# Altium PCB SGK_DVR_01.PcbDoc (part 2 of 7)
Units mil, origin at the board's own origin, x right, y up, seen from the top; angles counter-clockwise.
Board outline 3070.87 x 2598.47 mil, 6 copper layers (Top, L2 GND, l3 POWER, L4 SIG, L5 GND, Bottom), stack 58.1 mil thick; 475 components, 339 nets, 1964 pads, 1036 vias.
Unrouted connection lines stored in the file: 522.
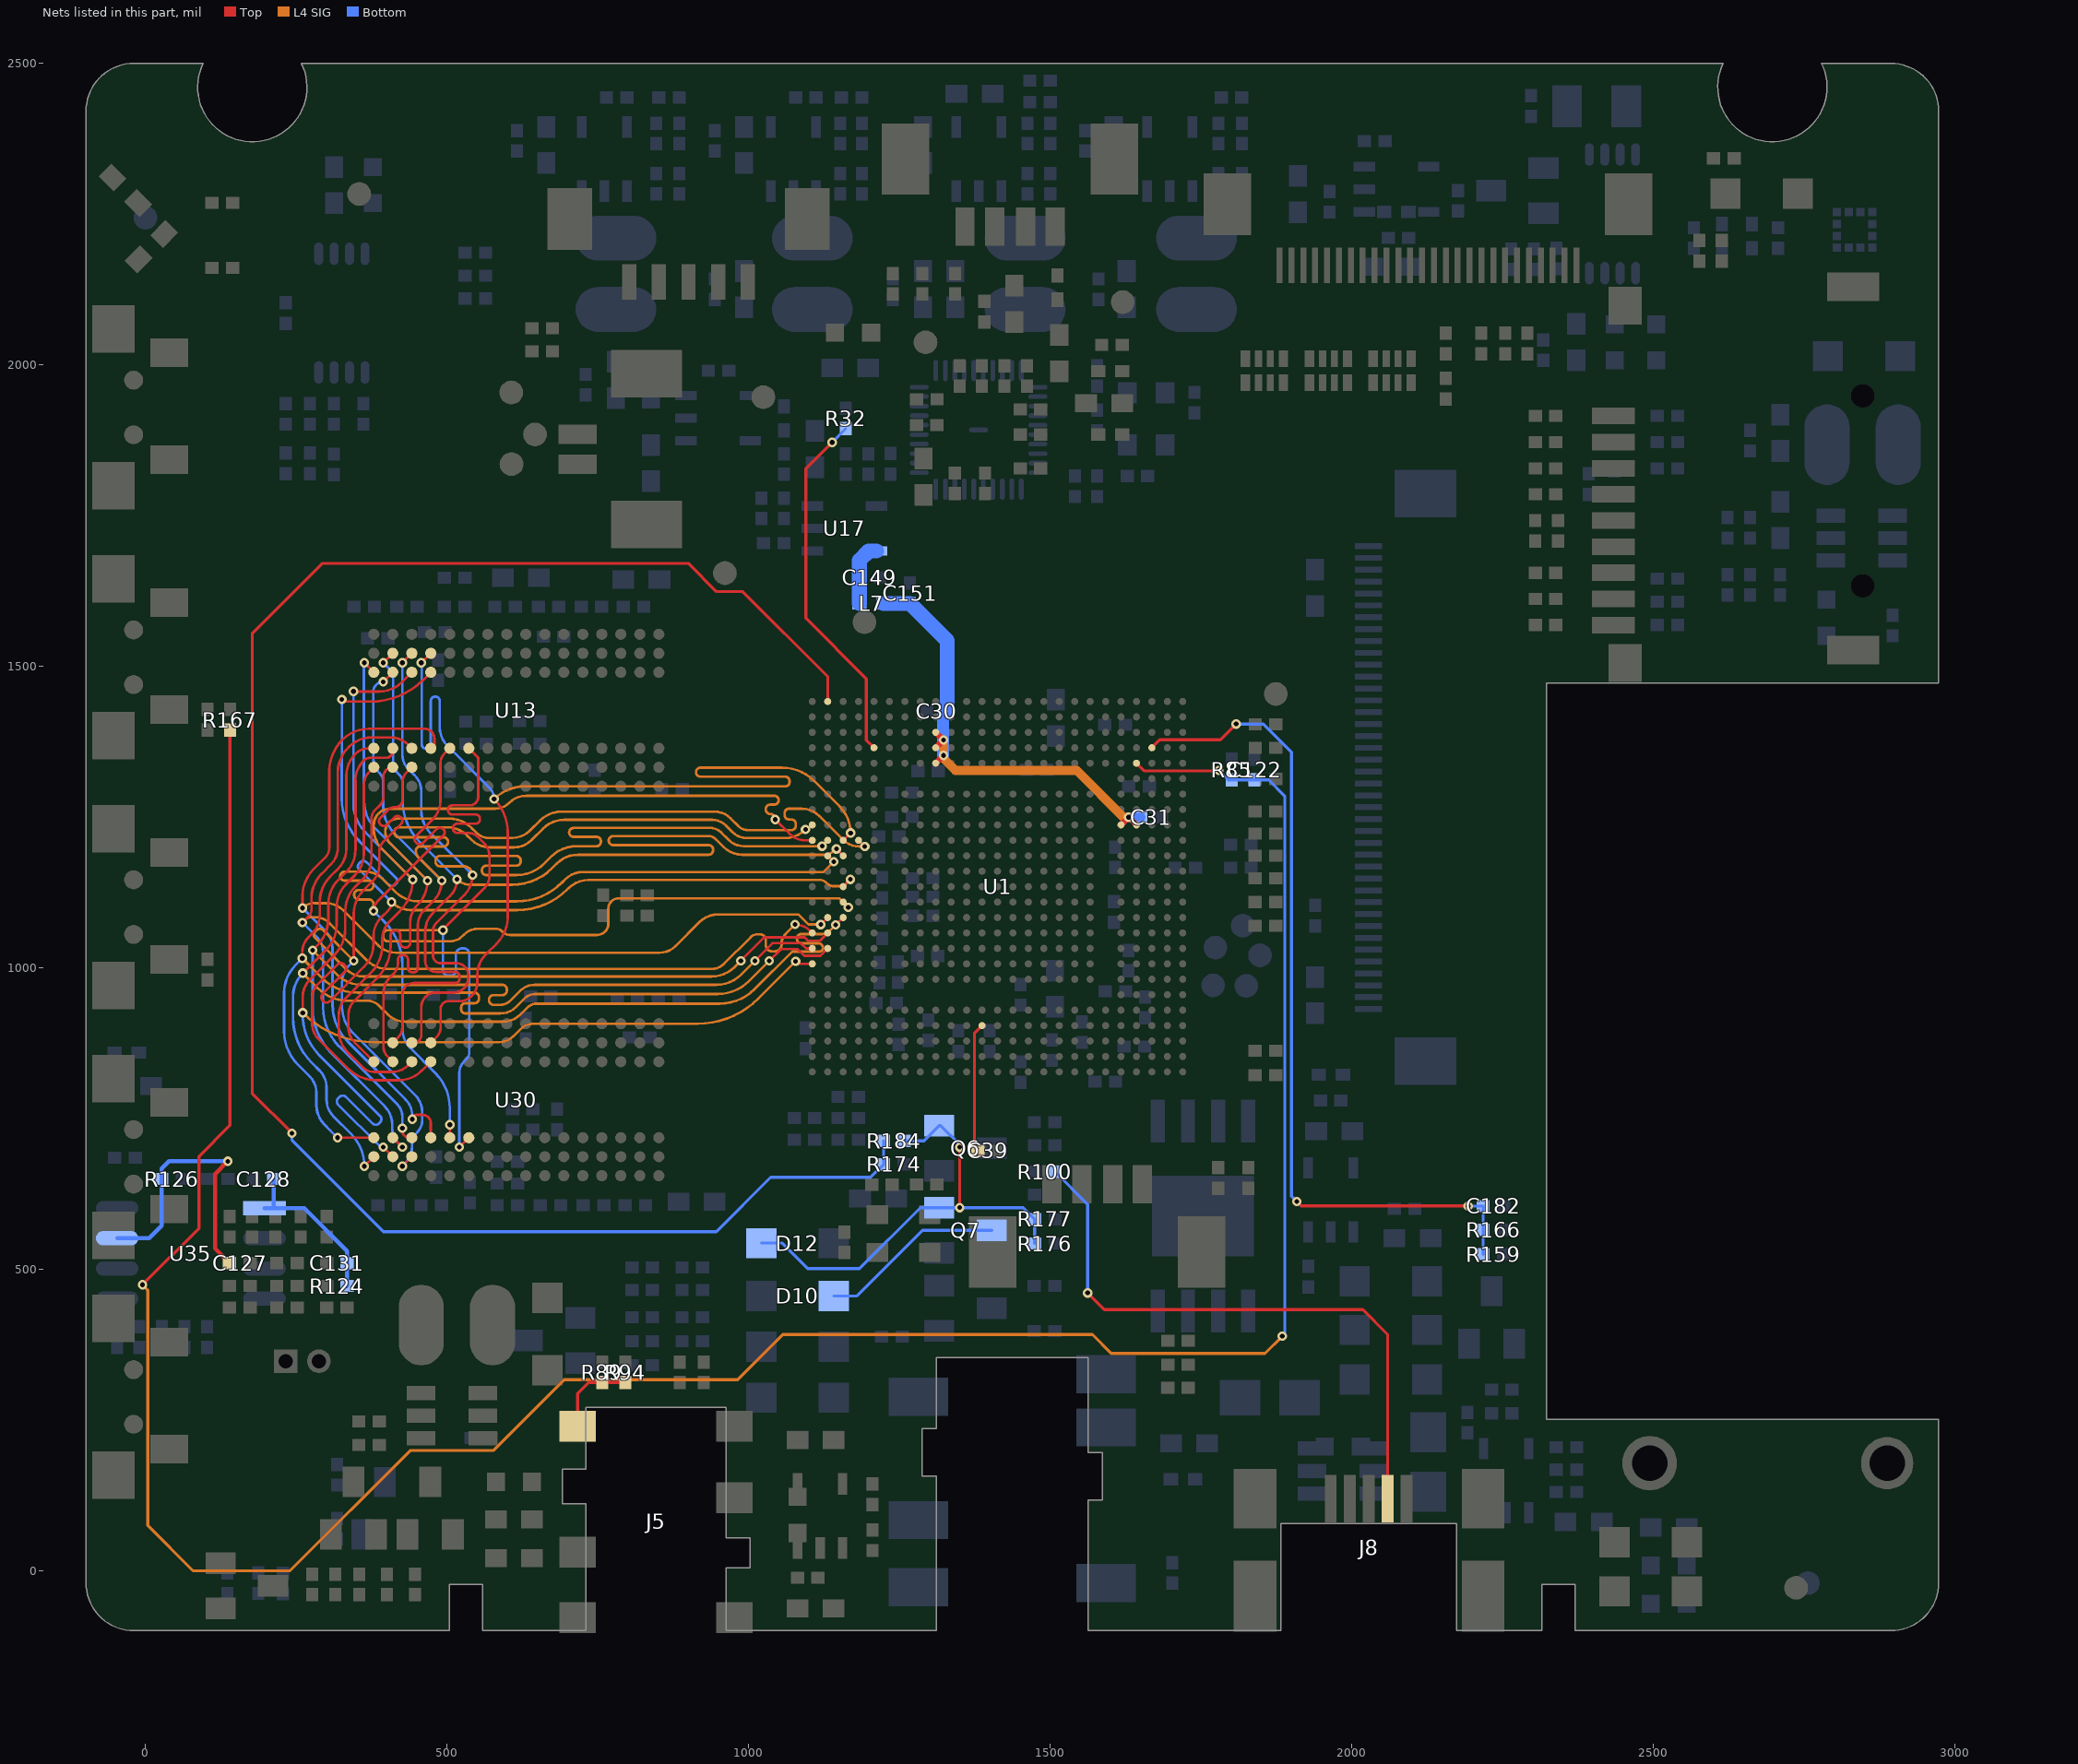
[diagram p4: the nets of this part, all layers, seen from the top]

## Part data
C1 C2 C3 C4 C5 C6 C7 C8 C9 C10 C11 C12 C13 C14 C15 C16 C17 C18 C19 C20 C21 C22 C23 C24 C25 C26 C27 C28 C29 C30 C31 C32 C33 C34 C43 C44 C56 C57 C58 C61 C62 C63 C64 C65 C68 C70 C71 C72 C73 C76 C79 C80 C81 C82 C88 C89 C90 C91 C93 C94 C95 C96 C115 C117 C124 C133 C135 C136 C138 C139 C145 C147 C149 C151 C152 C160 C176 C177 C181 C182 C183 C184 C185 C186 C201 C202 C204 C205: library part CAPACITOR
C35 C36 C49 C51 C97 C99 C101: library part CAP/CB_0
C39 C40 C41 C42 C74 C104 C105 C106 C107 C108 C109 C110 C116 C118 C119 C120 C121 C127 C128 C130 C131 C132 C137: library part CAPACITOR_0_Dup3
C45 C46 C47 C48 C50 C52 C53 C54 C66: library part "CAP NP_1"
C60: library part 1210_10nF10%-0402-X7R-50V
C67: library part 1241_100nF10%-0402-X7R-16V
C69: library part 1341_10uF20%-0603-X5R-6.3V
C77 C78 C122: library part CAPACITOR_0_Dup4
C98: library part "CAP NP_0"
C100: library part "CAP NP_1_Dup1"
C111 C112 C113 C114: library part CAPACITOR_0_Dup2
C123 C125 C126 C141 C142 C143 C144 C146 C148 C150 C153 C178 C179 C180 C196 C197 C198 C199 C200 C271 C272 C273 C274 C275 C276 C278 C282 C283 C284 C285: library part "CAP NP"
C129: library part 10uF+80%/-20%-1206-Y5V-25V
C134: library part CAPACITOR_0
C155 C156 C157 C158 C159 C161 C162 C163 C164 C165 C166 C167 C168 C169 C170 C171 C172 C173 C174 C175 C194 C195: library part CAP
CN1: library part SD/MICRO
D1: library part DIODE/SCHOTTKY
D2: library part DIODE_SCHOTTKY_0
D4 D9 D10 D11 D12 D13: library part DIODE
D5: library part DIODE_1, "二极管"
D6 D7 D8 D14: library part DIODE_0, "二极管"
FB1 FB4 FB5 FB6 FB7 FB9 FB10 FB11 FB12 FB13: library part "Ferrite BEAD"
FB8: library part INDUCTOR_0, "RoHS BEAD/600ohm 100Mhz Z=600Ω DCR<0.2Ω 800mA SMT L0603"
FPC1: library part CON40_2
J1 J2: library part CON6
J3: library part CON4
J5: library part PHONOJACK_0
J6: library part CON3_2
J7: library part CON3_0
J8: library part USB_MINI_SOCKET_2
J9: library part PHONOJACK_2
J13: library part CN30PIN_1
KEY1 KEY2 KEY3 KEY4 KEY5: library part button_1, "Button"
L1 L5 L9 L10 L11 L12: library part INDUCTOR_Dup1
L3 L7: library part INDUCTOR_2
LED1 LED2 LED3: library part LED
M1 M2 M3 M4 TP1 TP2 TP3 TP4 TP5 TP6 TP9 TP13 TP16 TP21 TP22 TP23 TP24 TP25: library part TP_0
MIC1: library part MIC_0
Q3 Q5 Q6: library part NPN
Q4 Q8: library part PMOS
Q7 Q9: library part "PNP CEB"
R1 R2 R11 R13 R45 R54 R60 R61 R62 R85 R123 R124 R125 R126 R127 R130 R132 R133 R141 R145 R146 R147 R148 R149 R150 R159 R161 R165 R166 R169 R170 R186 R187 R188: library part RESISTOR_Dup2
R3 R4 R5 R14 R15 R24 R31 R32 R33 R34 R35 R36 R49 R50 R52 R68 R69 R70 R71 R72 R73 R74 R75 R76 R77 R78 R79 R80 R104 R128 R134 R135 R136 R152 R153 R162 R164 R167 R171 R172 R192 R193 R194: library part RES/SMD_0
R6 R7 R28 R29 R30 R37 R86 R87 R88 R90 R93 R100 R105 R106 R107 R108 R109 R110 R111 R112 R113 R114 R116 R117 R118 R131 R157 R173 R174 R181 R184 R185 R198 R199 R200 R201: library part RES/SMD_1
R8 R9 R63 R64 R65 R66 R67 R82 R83 R84 R101 R102: library part ?_0
R10 R12 R46 R47 R48 R51 R53 R55 R56 R57 R58 R59 R92 R95 R96 R97 R103 R115 R178 R288: library part RESISTOR_Dup1, "RES - 200 ohm 0603 1/16W 1%"
R89 R94 R98 R99: library part RESISTOR
R121 R195 R196: library part R1005_0
R122 R129 R137 R138 R140 R142 R143 R144 R151 R154 R155 R156 R168 R177 R179 R180 R191: library part R_Dup1
R139 R163 R175 R176 R189 R190: library part R
RN4 RN5 RN6: library part 742C083/SM_0
U1: library part GK8601_12
U2: library part TCM809S
U4 U7 U17: library part RT9266PE_0
U6: library part AP3031_0
U8: library part RT8008_0
U9: library part LY8006_0
U10: library part PCF8563
U11: library part GSENSOR/BMA250E_1
U12: library part SPI-NOR-SO8_0
U13 U30: library part S25FL128P0XM_2
U14: library part RT9266PE_3
U15: library part RT9266PE_1
U16: library part RT9166
U18 U19 U20 U21: library part MP2161_2
U22: library part RT9266PE_0_Dup1
U23: library part PR2000K_0
U25: library part 2101_BL9193-3.3-SOT23-5
U35: library part LM358_0
Y1 Y3: library part CRYSTAL/4P
Y4: library part CRYSTAL_2

## Via types
v1: diameter 15.75, hole 7.87, Top to Bottom, 800 vias
v2: diameter 20, hole 12, Top to Bottom, 204 vias
v3: diameter 23.62, hole 11.81, Top to Bottom, 31 vias
v4: diameter 14, hole 8, Top to Bottom, 1 vias

## Nets (pads, with @x,y where several pads share a name; then routed paths per layer and width w, separated by ;. In a path a pad name is that pad's centre, name@x,y a point inside that pad or via, vN(x,y) a via of type N, cw(c..) or ccw(c..) an arc to the next point about the centre after c; other vN are vias at no path point)
A0: U1.AC13 U13.N3 U30.N3 | length 2342.9
  Top w4.2: v1(325.61,1445.37) 329.12,1441.86 373.56,1441.86 ccw(c373.56,1564.76) 460.46,1477.86 U13.N3@473.05,1490.44 ; v1(408.04,1109.46) cw(c388.51,1109.46) 402.32,1095.66 390.93,1084.27 ccw(c422.32,1052.88) 377.93,1052.88 377.93,1039.85 cw(c324.45,1039.85) 362.26,1002.03 305.26,945.03 cw(c300.07,950.22) 300.07,942.87 cw(c300.07,950.22) 294.87,945.03 293.49,946.4 cw(c298.69,951.6) 291.34,951.6 cw(c298.69,951.6) 293.49,956.8 330.78,994.09 ccw(c325.59,999.29) 332.94,999.29 ccw(c325.59,999.29) 330.78,1004.48 329.14,1006.13 ccw(c323.94,1000.93) 323.94,1008.28 ccw(c323.94,1000.93) 318.74,1006.13 284.71,972.1 ccw(c304.28,952.53) 276.6,952.53 276.6,906.43 ccw(c309.67,906.43) 286.29,883.05 336.24,833.1 ccw(c382.18,879.04) 382.18,814.07 419.35,814.07 ccw(c419.35,869.58) 458.6,830.33 U30.N3@473.05,844.78 ; U1.AC13@1156.52,1135.01 v1(1168.58,1147.18)
  L4 SIG w4.2: v1(1168.58,1147.18) 1161.19,1139.78 ; 439.82,1096.3 cw(c439.82,1141.24) v1(408.04,1109.46) ccw(c439.82,1141.24) 439.82,1096.3 ; 439.82,1096.3 616.64,1096.3 ; 616.64,1096.3 ccw(c616.64,1213.28) 699.36,1130.56 ; 616.64,1096.3 ccw(c616.64,1213.28) 699.36,1130.56 ; 699.36,1130.56 701.19,1132.4 ; 701.19,1132.4 cw(c734.48,1099.11) 734.48,1146.18 ; 701.19,1132.4 cw(c734.48,1099.11) 734.48,1146.18 ; 734.48,1146.18 1117.57,1146.18 ; 1117.57,1146.18 cw(c1117.57,1130.67) 1128.54,1141.64 ; 1117.57,1146.18 cw(c1117.57,1130.67) 1128.54,1141.64 ; 1128.54,1141.64 1129.67,1140.51 ; 1129.67,1140.51 ccw(c1141.27,1152.1) 1141.27,1135.71 ; 1129.67,1140.51 ccw(c1141.27,1152.1) 1141.27,1135.71 ; 1141.27,1135.71 1151.34,1135.71 ; 1151.34,1135.71 ccw(c1151.34,1149.63) 1161.18,1139.78 ; 1151.34,1135.71 ccw(c1151.34,1149.63) 1161.18,1139.78
  Bottom w4.2: v1(325.61,1445.37) 325.61,1397.94 325.38,1281.13 ccw(c425.41,1281.13) 354.68,1210.4 415.17,1149.9 cw(c409.98,1144.71) 417.33,1144.71 cw(c409.98,1144.71) 415.18,1139.52 413.94,1138.27 cw(c408.74,1143.47) 408.74,1136.12 cw(c408.74,1143.47) 403.55,1138.26 ; 356.1,1175.32 354.33,1173.56 ccw(c359.53,1168.36) 352.18,1168.36 ccw(c359.53,1168.36) 354.33,1163.17 v1(408.04,1109.46) ; 356.1,1175.32 cw(c361.29,1170.12) 361.29,1177.47 cw(c361.29,1170.12) 366.49,1175.32 403.54,1138.27
A1: U1.AE16 U13.P7 U30.P7 | length 2016.9
  Top w4.2: v1(260.15,1075.38) 269.91,1085.14 ccw(c256.84,1098.22) 275.33,1098.22 275.33,1115.94 cw(c333,1115.94) 292.22,1156.72 307.75,1172.25 ccw(c281.08,1198.92) 318.8,1198.92 318.8,1323.34 cw(c379.56,1323.34) 336.59,1366.3 cw(c375.79,1327.1) 375.79,1382.54 406.38,1382.54 cw(c406.38,1341.25) 435.57,1370.44 U13.P7@441.55,1364.46 ; v1(425.81,734.54) 425.81,730.37 ccw(c437.39,730.37) 437.39,718.79 U30.P7@441.55,718.79 ; U1.AE16@1105.34,1058.24 U1.AE16@1101.42,1062.16 ; U1.AE16@1101.42,1062.16 ccw(c1076.9,1037.64) v1(1076.9,1072.31) cw(c1076.9,1037.64) U1.AE16@1101.42,1062.16
  L4 SIG w4.2: v1(260.15,1075.38) v1@264.24,1079.48 ; v1(1076.9,1072.31) 1060.96,1056.37 ; v1@264.24,1079.48 cw(c276.04,1067.68) 276.04,1084.36 ; v1@264.24,1079.48 cw(c276.04,1067.68) 276.04,1084.36 ; 276.04,1084.36 282.09,1084.36 ; 282.09,1084.36 cw(c282.09,1051.97) 304.99,1074.88 ; 282.09,1084.36 cw(c282.09,1051.97) 304.99,1074.88 ; 304.99,1074.88 366.68,1013.19 ; 366.68,1013.19 ccw(c401.83,1048.34) 401.83,998.63 ; 366.68,1013.19 ccw(c401.83,1048.34) 401.83,998.63 ; 401.83,998.63 939.21,998.63 ; 939.21,998.63 ccw(c939.21,1026) 958.56,1006.65 ; 939.21,998.63 ccw(c939.21,1026) 958.56,1006.65 ; 958.56,1006.65 1003.16,1051.24 ; 1003.16,1051.24 cw(c1015.01,1039.39) 1015.01,1056.15 ; 1003.16,1051.24 cw(c1015.01,1039.39) 1015.01,1056.15 ; 1015.01,1056.15 1018.24,1056.15 ; 1018.24,1056.15 cw(c1018.24,1045.98) 1028.42,1045.98 ; 1018.24,1056.15 cw(c1018.24,1045.98) 1028.42,1045.98 ; 1028.42,1037.58 ccw(c1038.23,1037.58) 1038.23,1027.77 ; 1028.42,1037.58 ccw(c1038.23,1037.58) 1038.23,1027.77 ; 1028.42,1037.58 1028.42,1045.98 ; 1038.23,1027.77 1043.55,1027.77 ; 1043.55,1027.77 ccw(c1043.55,1038.72) 1054.5,1038.72 ; 1043.55,1027.77 ccw(c1043.55,1038.72) 1054.5,1038.72 ; 1054.5,1038.72 1054.5,1040.77 ; 1054.5,1040.77 cw(c1076.56,1040.77) 1060.96,1056.37 ; 1054.5,1040.77 cw(c1076.56,1040.77) 1060.96,1056.37
  Bottom w4.2: v1(260.15,1075.38) 284.69,1050.84 cw(c261.26,1027.41) 294.4,1027.41 294.4,934.97 ccw(c386.02,934.97) 321.23,870.18 417.42,774 cw(c397.16,753.75) 425.81,753.75 v1(425.81,734.54)
A2: U1.AE10 U13.P3 U30.P3 | length 2349.8
  Top w4.2: v1(344.8,1458.73) 345.07,1458.47 386.94,1458.47 ccw(c386.94,1513.1) 425.58,1474.47 U13.P3@441.55,1490.44 ; U30.P3@441.55,844.78 435.52,838.74 cw(c408.76,865.51) 408.76,827.66 378.92,827.66 cw(c378.92,853.93) 360.34,835.35 335.41,860.28 cw(c371.94,896.81) 320.28,896.81 320.28,920.3 cw(c364.87,920.3) 333.34,951.83 373.47,991.96 ccw(c326.98,1038.45) 392.73,1038.45 392.73,1048.65 cw(c432.82,1048.65) 404.47,1076.99 420.93,1093.46 ccw(c367.68,1146.71) 442.94,1143.85 442.99,1143.91 v1(442.99,1146.77) ; v1(1043.87,1246.35) 1067.33,1222.89 ; U1.AE10@1105.34,1211.78 1094.14,1211.78 ; 1067.33,1222.89 ccw(c1094.14,1249.7) 1094.14,1211.78 ; 1067.33,1222.89 ccw(c1094.14,1249.7) 1094.14,1211.78
  L4 SIG w4.2: v1(442.99,1146.77) 392,1197.76 ; v1(1043.87,1246.35) v1@1043.87,1247.29 ; 378.36,1230.68 ccw(c424.91,1230.68) 392,1197.76 ; 378.36,1230.68 ccw(c424.91,1230.68) 392,1197.76 ; 378.36,1230.68 ccw(c424.91,1230.68) 392,1197.76 ; 378.36,1230.68 ccw(c424.91,1230.68) 392,1197.76 ; 378.36,1230.68 ccw(c424.91,1230.68) 392,1197.76 ; 378.36,1230.68 ccw(c424.91,1230.68) 392,1197.76 ; 378.36,1230.68 378.36,1237.05 ; 378.36,1237.05 cw(c405.59,1237.05) 405.59,1264.28 ; 378.36,1237.05 cw(c405.59,1237.05) 405.59,1264.28 ; 405.59,1264.28 579.78,1264.28 ; 579.78,1264.28 ccw(c579.78,1297.02) 602.93,1273.87 ; 579.78,1264.28 ccw(c579.78,1297.02) 602.93,1273.87 ; 602.93,1273.87 603.34,1274.28 ; 603.34,1274.28 cw(c631.13,1246.5) 631.13,1285.79 ; 603.34,1274.28 cw(c631.13,1246.5) 631.13,1285.79 ; 603.34,1274.28 cw(c631.13,1246.5) 631.13,1285.79 ; 603.34,1274.28 cw(c631.13,1246.5) 631.13,1285.79 ; 603.34,1274.28 cw(c631.13,1246.5) 631.13,1285.79 ; 603.34,1274.28 cw(c631.13,1246.5) 631.13,1285.79 ; 631.13,1285.79 1042.32,1285.79 ; 1028.28,1262.89 ccw(c1035.63,1262.89) 1035.63,1255.54 ; 1028.28,1262.89 ccw(c1035.63,1262.89) 1035.63,1255.54 ; 1028.28,1262.89 1028.28,1263.68 ; 1028.28,1263.68 cw(c1035.63,1263.68) 1035.63,1271.03 ; 1028.28,1263.68 cw(c1035.63,1263.68) 1035.63,1271.03 ; 1035.63,1255.54 cw(c1035.63,1247.29) v1@1043.87,1247.29 ; 1035.63,1255.54 cw(c1035.63,1247.29) v1@1043.87,1247.29 ; 1035.63,1271.03 1042.32,1271.03 ; 1042.32,1271.03 ccw(c1042.32,1278.38) 1049.67,1278.38 ; 1042.32,1271.03 ccw(c1042.32,1278.38) 1049.67,1278.38 ; 1042.32,1285.79 cw(c1042.32,1278.44) 1049.67,1278.44 ; 1042.32,1285.79 cw(c1042.32,1278.44) 1049.67,1278.44 ; 1049.67,1278.38 1049.67,1278.44
  Bottom w4.2: v1(344.8,1458.73) 344.8,1272.41 ccw(c411.06,1272.41) 364.21,1225.55 v1(442.99,1146.77)
A3: U1.AC10 U13.N2 U30.N2 | length 2351.5
  Top w4.2: v1(457.3,1506.19) U13.N2@473.05,1521.94 ; U30.N2@473.05,876.27 482.81,886.03 ccw(c467.4,901.43) 489.19,901.43 489.19,931.88 cw(c502.6,931.88) 502.6,945.29 521.86,945.29 ccw(c521.86,970.41) 539.61,952.64 541.44,954.47 ccw(c520.82,975.1) 549.98,975.1 549.98,987.49 cw(c600.74,987.49) 564.85,1023.38 582.06,1040.59 ccw(c537.28,1085.37) 600.61,1085.37 600.61,1225.29 ccw(c522.51,1225.29) 579.06,1279.17 v1(578.1,1280.24) ; v1@578.02,1280.21 v1(578.1,1280.24) ; U1.AC10@1156.52,1211.78 v1(1168.94,1224.03)
  L4 SIG w4.2: 628.91,1301.29 ccw(c628.91,1229.43) v1(578.1,1280.24) cw(c628.91,1229.43) 628.91,1301.29 ; 628.91,1301.29 646.28,1301.28 1060.42,1301.28 ; 912.65,1324.74 ccw(c920,1324.74) 920,1317.39 ; 912.65,1324.74 ccw(c920,1324.74) 920,1317.39 ; 912.65,1324.74 912.65,1324.99 ; 912.65,1324.99 cw(c920,1324.99) 920,1332.34 ; 912.65,1324.99 cw(c920,1324.99) 920,1332.34 ; 920,1317.39 1060.42,1317.39 ; 920,1332.34 1055.08,1332.34 ; 1055.08,1332.34 cw(c1055.08,1256.51) 1108.7,1310.13 ; 1055.08,1332.34 cw(c1055.08,1256.51) 1108.7,1310.13 ; 1060.42,1301.28 ccw(c1060.42,1308.63) 1067.77,1308.63 ; 1060.42,1301.28 ccw(c1060.42,1308.63) 1067.77,1308.63 ; 1060.42,1317.39 cw(c1060.42,1310.04) 1067.77,1310.04 ; 1060.42,1317.39 cw(c1060.42,1310.04) 1067.77,1310.04 ; 1067.77,1308.63 1067.77,1310.04 ; 1108.7,1310.13 1150.66,1268.17 ; 1150.66,1268.17 cw(c1106.52,1224.03) v1(1168.94,1224.03) ; 1150.66,1268.17 cw(c1106.52,1224.03) v1(1168.94,1224.03) ; 1150.66,1268.17 cw(c1106.52,1224.03) v1(1168.94,1224.03) ; 1150.66,1268.17 cw(c1106.52,1224.03) v1(1168.94,1224.03) ; 1150.66,1268.17 cw(c1106.52,1224.03) v1(1168.94,1224.03) ; 1150.66,1268.17 cw(c1106.52,1224.03) v1(1168.94,1224.03)
  Bottom w4.2: v1(457.3,1506.19) 458.11,1505.39 458.11,1370.95 ccw(c465.46,1370.95) 465.46,1363.6 465.66,1363.6 ccw(c465.66,1370.95) 473.01,1370.95 473.01,1442.8 cw(c480.36,1442.8) 480.36,1450.15 480.5,1450.15 cw(c480.5,1442.8) 487.85,1442.8 487.85,1399.14 ccw(c530.65,1399.14) 500.38,1368.88 570.23,1299.03 cw(c551.44,1280.24) 577.63,1284.74 577.63,1280.62 v1(578.1,1280.24)
A4: U1.AD16 U13.P8 U30.P8 | length 2105.1
  Top w4.2: v1(345.37,1012.08) 345.37,1030.86 345.33,1030.9 345.33,1089.41 cw(c402.11,1089.41) 361.98,1129.58 377.22,1144.81 ccw(c351.79,1170.27) 387.77,1170.27 387.77,1193.16 cw(c411.2,1193.16) 394.63,1209.72 423.81,1238.9 ccw(c418.61,1244.1) 425.96,1244.1 ccw(c418.61,1244.1) 423.81,1249.29 423.14,1249.96 ccw(c417.94,1244.77) 417.94,1252.12 ccw(c417.94,1244.77) 412.75,1249.96 ; 412.75,1249.96 400.47,1237.69 cw(c395.27,1242.89) 395.27,1235.54 cw(c395.27,1242.89) 390.08,1237.69 389.21,1238.56 cw(c394.41,1243.75) 387.06,1243.75 cw(c394.41,1243.75) 389.21,1248.95 403,1262.74 cw(c412.92,1252.81) 412.92,1266.85 414.84,1266.85 ccw(c414.84,1278.03) 426.02,1278.03 426.02,1308.42 cw(c447.77,1308.42) 432.39,1323.8 U13.P8@441.55,1332.96 ; v1(425.81,671.55) U30.P8@441.55,687.29 ; v1(986.92,1012.02) 1025.82,1050.92 1092.8,1050.92 1098.4,1045.32 1118.01,1045.32 U1.AD16@1130.93,1058.24
  L4 SIG w4.2: v1(345.37,1012.08) 294.34,1063.11 ; v1(986.92,1012.02) 976.56,1001.71 ; 279.09,1055.21 cw(c286.44,1055.21) 281.25,1060.41 ; 279.09,1055.21 cw(c286.44,1055.21) 281.25,1060.41 ; 279.09,1055.21 ccw(c286.44,1055.21) 281.25,1050.01 ; 279.09,1055.21 ccw(c286.44,1055.21) 281.25,1050.01 ; 281.25,1050.01 334.08,997.18 ; 281.25,1060.41 283.95,1063.11 ; 283.95,1063.11 cw(c289.14,1057.91) 289.14,1065.26 ; 283.95,1063.11 cw(c289.14,1057.91) 289.14,1065.26 ; 289.14,1065.26 cw(c289.14,1057.91) 294.34,1063.11 ; 289.14,1065.26 cw(c289.14,1057.91) 294.34,1063.11 ; 289.14,1065.26 cw(c289.14,1057.91) 294.34,1063.11 ; 289.14,1065.26 cw(c289.14,1057.91) 294.34,1063.11 ; 289.14,1065.26 cw(c289.14,1057.91) 294.34,1063.11 ; 289.14,1065.26 cw(c289.14,1057.91) 294.34,1063.11 ; 334.08,997.18 ccw(c361.25,1024.36) 361.25,985.93 ; 334.08,997.18 ccw(c361.25,1024.36) 361.25,985.93 ; 334.08,997.18 ccw(c361.25,1024.36) 361.25,985.93 ; 334.08,997.18 ccw(c361.25,1024.36) 361.25,985.93 ; 334.08,997.18 ccw(c361.25,1024.36) 361.25,985.93 ; 334.08,997.18 ccw(c361.25,1024.36) 361.25,985.93 ; 361.25,985.93 938.47,985.93 ; 938.47,985.93 ccw(c938.47,1039.8) 976.56,1001.71 ; 938.47,985.93 ccw(c938.47,1039.8) 976.56,1001.71
  Bottom w4.2: v1(345.37,1012.08) 337.63,1004.34 ccw(c366.13,975.84) 325.82,975.84 325.82,936.74 ccw(c388.8,936.74) 344.27,892.21 446.94,789.53 cw(c418.05,760.65) 458.91,760.65 458.91,747.84 cw(c430.68,747.84) 450.64,727.88 ccw(c471.17,707.34) 442.13,707.34 442.13,704.95 cw(c400.91,704.95) 430.06,675.8 v1(425.81,671.55)
A5: U1.AD10 U13.P2 U30.P2 | length 2447.8
  Top w4.2: v1(425.81,1506.19) U13.P2@441.55,1521.94 ; U30.P2@441.55,876.27 444.71,876.27 ccw(c444.71,888.8) 457.24,888.8 457.24,935.5 cw(c481.2,935.5) 481.2,959.47 510.89,959.47 ccw(c510.89,983.79) 535.22,983.79 535.22,988.31 ccw(c515.5,988.31) 515.5,1008.03 489.61,1008.03 cw(c489.61,1020.98) 476.65,1020.98 476.65,1061.51 cw(c495.26,1061.51) 482.1,1074.67 528.57,1121.13 ccw(c495.56,1154.14) v1(542.24,1154.14) ; v1(1121.7,1202.16) U1.AD10@1130.93,1211.78
  L4 SIG w4.2: v1(1121.7,1202.16) 992.04,1202.16 ; 480.86,1176.22 ccw(c488.21,1176.22) 488.21,1168.87 ; 480.86,1176.22 ccw(c488.21,1176.22) 488.21,1168.87 ; 480.86,1176.22 480.86,1178.54 ; 480.86,1178.54 cw(c488.21,1178.54) 488.21,1185.89 ; 480.86,1178.54 cw(c488.21,1178.54) 488.21,1185.89 ; 488.21,1168.87 527.51,1168.87 ; 488.21,1185.89 614.69,1185.89 ; 527.51,1168.87 cw(c527.51,1154.14) v1(542.24,1154.14) ccw(c527.51,1154.14) 527.51,1168.87 ; 557.69,1161.49 ccw(c565.03,1161.49) 565.03,1154.14 ; 557.69,1161.49 ccw(c565.03,1161.49) 565.03,1154.14 ; 557.68,1161.49 557.68,1162.41 ; 557.69,1162.41 cw(c565.03,1162.41) 565.03,1169.76 ; 557.69,1162.41 cw(c565.03,1162.41) 565.03,1169.76 ; 565.03,1154.14 614.91,1154.14 ; 565.03,1169.76 614.69,1169.76 ; 614.69,1169.76 ccw(c614.69,1177.11) 622.04,1177.11 ; 614.69,1169.76 ccw(c614.69,1177.11) 622.04,1177.11 ; 614.69,1185.89 cw(c614.69,1178.54) 622.04,1178.54 ; 614.69,1185.89 cw(c614.69,1178.54) 622.04,1178.54 ; 614.91,1154.14 ccw(c614.91,1219.37) 661.03,1173.24 ; 614.91,1154.14 ccw(c614.91,1219.37) 661.03,1173.24 ; 622.04,1177.11 622.04,1178.54 ; 661.03,1173.24 672.47,1184.68 ; 672.47,1184.68 cw(c714.67,1142.48) 714.67,1202.16 ; 672.47,1184.68 cw(c714.67,1142.48) 714.67,1202.16 ; 672.47,1184.68 cw(c714.67,1142.48) 714.67,1202.16 ; 672.47,1184.68 cw(c714.67,1142.48) 714.67,1202.16 ; 672.47,1184.68 cw(c714.67,1142.48) 714.67,1202.16 ; 672.47,1184.68 cw(c714.67,1142.48) 714.67,1202.16 ; 702.4,1224.95 ccw(c709.75,1224.95) 709.75,1217.6 ; 702.4,1224.95 ccw(c709.75,1224.95) 709.75,1217.6 ; 702.4,1224.95 702.4,1225.06 ; 702.4,1225.06 cw(c709.75,1225.06) 709.75,1232.41 ; 702.4,1225.06 cw(c709.75,1225.06) 709.75,1232.41 ; 709.75,1217.6 747.69,1217.6 ; 709.75,1232.41 936.06,1232.41 ; 714.67,1202.16 747.69,1202.16 ; 747.69,1202.16 ccw(c747.69,1209.51) 755.04,1209.51 ; 747.69,1202.16 ccw(c747.69,1209.51) 755.04,1209.51 ; 747.69,1217.6 cw(c747.69,1210.25) 755.04,1210.25 ; 747.69,1217.6 cw(c747.69,1210.25) 755.04,1210.25 ; 755.04,1209.51 755.04,1210.25 ; 936.06,1232.41 cw(c936.06,1206.45) 954.42,1224.81 ; 936.06,1232.41 cw(c936.06,1206.45) 954.42,1224.81 ; 954.42,1224.81 966.48,1212.74 ; 966.48,1212.74 ccw(c992.04,1238.31) 992.04,1202.16 ; 966.48,1212.74 ccw(c992.04,1238.31) 992.04,1202.16 ; 966.48,1212.74 ccw(c992.04,1238.31) 992.04,1202.16 ; 966.48,1212.74 ccw(c992.04,1238.31) 992.04,1202.16 ; 966.48,1212.74 ccw(c992.04,1238.31) 992.04,1202.16 ; 966.48,1212.74 ccw(c992.04,1238.31) 992.04,1202.16
  Bottom w4.2: v1(425.81,1506.19) 425.81,1354.11 ccw(c459.65,1354.11) 435.72,1330.18 446.15,1319.75 cw(c419.41,1293) 457.23,1293 457.23,1261.51 ccw(c511.23,1261.51) 473.05,1223.33 v1(542.24,1154.14)
A6: U1.AE18 U13.R8 U30.R8 | length 2567.8
  Top w4.2: v1(260.75,925.84) 260.75,952.36 cw(c301.25,952.36) 272.62,980.99 312.75,1021.13 ccw(c268.2,1065.67) 331.2,1065.67 331.2,1094.8 cw(c388.33,1094.8) 347.93,1135.19 360.93,1148.19 ccw(c327.97,1181.14) 374.57,1181.14 374.57,1246.66 cw(c397.3,1246.66) 381.23,1262.73 388.41,1269.91 ccw(c373.75,1284.56) 394.45,1283.45 ccw(c373.73,1284.56) 394.48,1284.56 394.48,1317.39 cw(c410.06,1317.39) U13.R8@410.06,1332.96 ; v1(394.31,703.04) U30.R8@410.06,687.29 ; v1(1077.8,1011.31) 1080.5,1007.06 U1.AE18@1105.34,1007.06
  L4 SIG w4.2: v1(1077.8,1011.31) 1015.95,949.46 ; 378.04,877.26 cw(c378.04,1043.13) v1(260.75,925.84) ccw(c378.04,1043.13) 378.04,877.26 ; 378.04,877.26 586.6,877.26 ; 586.6,877.26 ccw(c586.6,910.21) 609.9,886.91 ; 586.6,877.26 ccw(c586.6,910.21) 609.9,886.91 ; 609.9,886.91 621.79,898.8 ; 621.79,898.8 cw(c643.5,877.09) 643.5,907.79 ; 621.79,898.8 cw(c643.5,877.09) 643.5,907.79 ; 643.5,907.79 915.36,907.79 ; 915.36,907.79 ccw(c915.36,1050.04) 1015.95,949.46 ; 915.36,907.79 ccw(c915.36,1050.04) 1015.95,949.46 ; 915.36,907.79 ccw(c915.36,1050.04) 1015.95,949.46 ; 915.36,907.79 ccw(c915.36,1050.04) 1015.95,949.46 ; 915.36,907.79 ccw(c915.36,1050.04) 1015.95,949.46 ; 915.36,907.79 ccw(c915.36,1050.04) 1015.95,949.46
  Bottom w4.2: v1(260.75,925.84) 260.75,920.97 260.76,917.38 260.88,917.26 ccw(c354.93,922.15) 288.34,855.56 389.11,754.79 cw(c383.91,749.59) 391.26,749.59 cw(c383.91,749.59) 389.11,744.39 387.07,742.35 cw(c381.87,747.54) 381.87,740.19 cw(c381.87,747.54) 376.67,742.35 332.31,786.46 ccw(c327.11,781.26) 327.11,788.61 ccw(c327.11,781.26) 321.91,786.46 319.4,783.95 ccw(c324.61,778.75) 317.25,778.75 ccw(c324.61,778.75) 319.4,773.56 390.16,703.04 v1(394.31,703.04)
A7: U1.AC11 U13.R2 U30.R2 | length 2299.7
  Top w4.2: v1(394.31,1506.19) U13.R2@410.06,1521.94 ; U30.R2@410.06,876.27 419.06,885.27 ccw(c402.4,901.93) 425.96,901.93 425.96,956.74 cw(c444.46,956.74) 444.46,975.24 513.47,975.24 ccw(c513.47,982.59) 520.82,982.59 520.82,986.3 ccw(c513.47,986.3) 513.47,993.65 481.28,993.65 cw(c481.28,1011.03) 463.91,1011.03 463.91,1061.57 cw(c504.77,1061.57) 475.88,1090.47 505.23,1119.83 ccw(c477.88,1147.17) v1(516.56,1147.17) ; v1(1145.37,1197.56) U1.AC11@1156.52,1186.19
  L4 SIG w4.2: v1(1145.37,1197.56) v1@1144.5,1196.69 ; 538.03,1138.28 cw(c538.03,1168.65) v1(516.56,1147.17) ccw(c538.03,1168.65) 538.03,1138.28 ; 538.03,1138.28 608.23,1138.28 ; 608.23,1138.28 ccw(c608.23,1231.39) 674.08,1165.55 ; 608.23,1138.28 ccw(c608.23,1231.39) 674.08,1165.55 ; 674.08,1165.55 681.89,1173.36 ; 681.89,1173.36 cw(c717.21,1138.04) 717.21,1187.99 ; 681.89,1173.36 cw(c717.21,1138.04) 717.21,1187.99 ; 681.89,1173.36 cw(c717.21,1138.04) 717.21,1187.99 ; 681.89,1173.36 cw(c717.21,1138.04) 717.21,1187.99 ; 681.89,1173.36 cw(c717.21,1138.04) 717.21,1187.99 ; 681.89,1173.36 cw(c717.21,1138.04) 717.21,1187.99 ; 717.21,1187.99 933.59,1187.99 ; 768,1211.32 ccw(c775.35,1211.32) 775.35,1203.97 ; 768,1211.32 ccw(c775.35,1211.32) 775.35,1203.97 ; 768,1211.32 768,1211.54 ; 768,1211.54 cw(c775.35,1211.54) 775.35,1218.89 ; 768,1211.54 cw(c775.35,1211.54) 775.35,1218.89 ; 775.35,1203.97 933.59,1203.97 ; 775.35,1218.89 933.39,1218.89 ; 933.39,1218.89 cw(c933.39,1202.29) 945.13,1214.03 ; 933.39,1218.89 cw(c933.39,1202.29) 945.13,1214.03 ; 933.59,1187.99 ccw(c933.59,1195.34) 940.94,1195.34 ; 933.59,1187.99 ccw(c933.59,1195.34) 940.94,1195.34 ; 933.59,1203.97 cw(c933.59,1196.62) 940.94,1196.62 ; 933.59,1203.97 cw(c933.59,1196.62) 940.94,1196.62 ; 940.94,1195.34 940.94,1196.62 ; 945.13,1214.03 958.21,1200.94 ; 958.21,1200.94 ccw(c989.48,1232.21) 989.48,1187.99 ; 958.21,1200.94 ccw(c989.48,1232.21) 989.48,1187.99 ; 989.48,1187.99 1123.51,1187.99 ; 1123.51,1187.99 ccw(c1123.51,1217.67) v1@1144.5,1196.69 ; 1123.51,1187.99 ccw(c1123.51,1217.67) v1@1144.5,1196.69
  Bottom w4.2: v1(394.31,1506.19) 410.56,1489.95 410.56,1342.46 ccw(c438.78,1342.46) 418.82,1322.51 421.27,1320.05 cw(c409.01,1307.78) 426.36,1307.78 426.36,1278.04 ccw(c524.54,1278.04) 455.11,1208.62 v1(516.56,1147.17)
A8: U1.AC15 U13.T8 U30.T8 | length 2385.9
  Top w4.2: v1(260.73,991.55) 299.72,1030.54 ccw(c257.99,1072.28) 317.01,1072.28 317.01,1100.57 cw(c372.85,1100.57) 333.37,1140.05 347.19,1153.88 ccw(c311.58,1189.48) 361.94,1189.48 361.94,1303.37 cw(c393.26,1303.37) 371.11,1325.52 U13.T8@378.56,1332.96 ; v1(362.81,671.55) U30.T8@378.56,687.29 ; v1(1144.16,1071.52) U1.AC15@1156.52,1083.83
  L4 SIG w4.2: v1(260.73,991.55) 285.34,966.94 ; v1(1144.16,1071.52) 1134.29,1061.65 ; 285.34,966.94 ccw(c336.33,1017.93) 336.33,945.82 ; 285.34,966.94 ccw(c336.33,1017.93) 336.33,945.82 ; 336.33,945.82 368.29,945.82 ; 368.29,945.82 cw(c368.29,919.94) 386.59,938.24 ; 368.29,945.82 cw(c368.29,919.94) 386.59,938.24 ; 386.59,938.24 401.62,923.21 ; 401.62,923.21 ccw(c431.19,952.78) 431.19,910.96 ; 401.62,923.21 ccw(c431.19,952.78) 431.19,910.96 ; 431.19,910.96 591.81,910.96 ; 591.81,910.96 ccw(c591.81,953.64) 621.99,923.46 ; 591.81,910.96 ccw(c591.81,953.64) 621.99,923.46 ; 621.98,923.46 633.13,934.6 ; 633.13,934.6 cw(c648.71,919.02) 648.71,941.06 ; 633.13,934.6 cw(c648.71,919.02) 648.71,941.06 ; 648.71,941.06 951.81,941.06 ; 951.81,941.06 ccw(c951.81,1023.18) 1009.88,965.11 ; 951.81,941.06 ccw(c951.81,1023.18) 1009.88,965.11 ; 951.81,941.06 ccw(c951.81,1023.18) 1009.88,965.11 ; 951.81,941.06 ccw(c951.81,1023.18) 1009.88,965.11 ; 951.81,941.06 ccw(c951.81,1023.18) 1009.88,965.11 ; 951.81,941.06 ccw(c951.81,1023.18) 1009.88,965.11 ; 1009.88,965.11 1072.15,1027.38 1117.24,1027.38 ; 1080,1048.27 ccw(c1087.35,1048.27) 1087.35,1040.92 ; 1080,1048.27 ccw(c1087.35,1048.27) 1087.35,1040.92 ; 1080,1048.27 1080,1049.18 ; 1080,1049.18 cw(c1087.35,1049.18) 1087.35,1056.53 ; 1080,1049.18 cw(c1087.35,1049.18) 1087.35,1056.53 ; 1087.35,1040.92 1115.76,1040.92 ; 1087.35,1056.53 1121.93,1056.53 ; 1115.76,1040.92 cw(c1115.76,1033.57) 1123.11,1033.57 ; 1115.76,1040.92 cw(c1115.76,1033.57) 1123.11,1033.57 ; 1117.24,1027.38 ccw(c1117.24,1033.25) 1123.11,1033.25 ; 1117.24,1027.38 ccw(c1117.24,1033.25) 1123.11,1033.25 ; 1121.93,1056.53 ccw(c1121.93,1074.01) 1134.29,1061.65 ; 1121.93,1056.53 ccw(c1121.93,1074.01) 1134.29,1061.65 ; 1123.11,1033.25 1123.11,1033.57
  Bottom w4.2: v1(260.73,991.55) 258.25,989.07 258.25,988.89 256.89,987.54 256.89,987.28 ccw(c299.44,952.84) 244.7,952.84 244.7,917.97 ccw(c350.65,917.97) 275.73,843.05 289.07,829.71 cw(c262.04,802.69) 300.26,802.69 300.26,782.06 ccw(c340,782.06) 311.9,753.96 340.54,725.31 cw(c286.77,671.55) v1(362.81,671.55)
A9: U1.AE9 U13.R3 U30.R3 | length 2261.6
  Top w4.2: v1(394.31,1474.7) U13.R3@410.06,1490.44 ; U30.R3@410.06,844.78 401.09,853.75 cw(c416.6,869.26) 394.66,869.26 394.66,958.66 cw(c431.26,958.66) 405.38,984.54 411.41,990.57 ccw(c394.05,1007.93) 418.6,1007.93 418.6,1014.11 cw(c425.95,1014.11) 425.95,1021.46 427.93,1021.46 cw(c427.93,1014.11) 435.28,1014.11 435.28,1000.29 ccw(c442.63,1000.29) 442.63,992.94 444.22,992.94 ccw(c444.22,1000.29) 451.57,1000.29 451.57,1071.12 cw(c486.71,1071.12) 461.86,1095.97 477.31,1111.42 ccw(c443.77,1144.96) v1(491.2,1144.96) ; v1(1094.24,1229.77) U1.AE9@1105.34,1237.37
  L4 SIG w4.2: v1(491.2,1144.96) 452.71,1183.45 ; 412.81,1224.21 ccw(c420.16,1224.21) 420.16,1216.86 ; 412.81,1224.21 ccw(c420.16,1224.21) 420.16,1216.86 ; 412.81,1224.21 412.81,1226.02 ; 412.81,1226.02 cw(c420.16,1226.02) 420.16,1233.37 ; 412.81,1226.02 cw(c420.16,1226.02) 420.16,1233.37 ; 420.16,1216.86 494.33,1216.86 ; 420.16,1233.37 500.89,1233.37 ; 448.18,1194.39 cw(c455.53,1194.39) 455.53,1201.74 ; 448.18,1194.39 cw(c455.53,1194.39) 455.53,1201.74 ; 448.18,1194.39 ccw(c463.65,1194.39) 452.71,1183.45 ; 448.18,1194.39 ccw(c463.65,1194.39) 452.71,1183.45 ; 448.18,1194.39 ccw(c463.65,1194.39) 452.71,1183.45 ; 448.18,1194.39 ccw(c463.65,1194.39) 452.71,1183.45 ; 448.18,1194.39 ccw(c463.65,1194.39) 452.71,1183.45 ; 448.18,1194.39 ccw(c463.65,1194.39) 452.71,1183.45 ; 455.53,1201.74 494.33,1201.74 ; 494.33,1201.74 ccw(c494.33,1209.09) 501.68,1209.09 ; 494.33,1201.74 ccw(c494.33,1209.09) 501.68,1209.09 ; 494.33,1216.86 cw(c494.33,1209.51) 501.68,1209.51 ; 494.33,1216.86 cw(c494.33,1209.51) 501.68,1209.51 ; 500.89,1233.37 cw(c500.89,1188) 532.97,1220.08 ; 500.89,1233.37 cw(c500.89,1188) 532.97,1220.08 ; 500.89,1233.37 cw(c500.89,1188) 532.97,1220.08 ; 500.89,1233.37 cw(c500.89,1188) 532.97,1220.08 ; 500.89,1233.37 cw(c500.89,1188) 532.97,1220.08 ; 500.89,1233.37 cw(c500.89,1188) 532.97,1220.08 ; 501.68,1209.09 501.68,1209.51 ; 532.97,1220.08 540.06,1212.99 ; 540.06,1212.99 ccw(c570.87,1243.81) 570.87,1200.23 ; 540.06,1212.99 ccw(c570.87,1243.81) 570.87,1200.23 ; 570.87,1200.23 611.26,1200.23 ; 611.26,1200.23 ccw(c611.26,1240.85) 639.99,1212.12 ; 611.26,1200.23 ccw(c611.26,1240.85) 639.99,1212.12 ; 639.99,1212.12 659.18,1231.32 ; 659.18,1231.32 cw(c694.13,1196.37) 694.13,1245.79 ; 659.18,1231.32 cw(c694.13,1196.37) 694.13,1245.79 ; 694.13,1245.79 939.57,1245.79 ; 939.57,1245.79 cw(c939.57,1214.43) 961.75,1236.61 ; 939.57,1245.79 cw(c939.57,1214.43) 961.75,1236.61 ; 961.75,1236.61 973.27,1225.08 ; 973.27,1225.08 ccw(c996.13,1247.95) 996.13,1215.61 ; 973.27,1225.08 ccw(c996.13,1247.95) 996.13,1215.61 ; 996.13,1215.61 1060.07,1215.61 ; 1060.07,1215.61 ccw(c1060.07,1263.93) v1(1094.24,1229.77) cw(c1060.07,1263.93) 1060.07,1215.61
  Bottom w4.2: v1(394.31,1474.7) ccw(c394.31,1458.02) 377.63,1458.02 377.63,1348.08 ccw(c412.56,1348.08) 387.86,1323.38 387.98,1323.27 cw(c372.69,1307.98) 394.31,1307.98 394.31,1268.3 ccw(c458.15,1268.3) 413.01,1223.15 v1(491.2,1144.96)
A10: U1.AC14 U13.L7 U30.L7 | length 2116.5
  Top w4.2: v1(493.12,1062.79) 493.12,1064.24 561.92,1133.04 ccw(c541.55,1153.41) 570.36,1153.41 570.36,1184.1 ccw(c535.76,1184.1) 560.22,1208.56 551.77,1217.01 ccw(c534.59,1199.83) 534.59,1224.13 517.05,1224.13 cw(c517.05,1231.48) 509.7,1231.48 509.7,1232.07 cw(c517.05,1232.07) 517.05,1239.42 547.15,1239.42 ccw(c547.15,1246.77) 554.5,1246.77 554.5,1247.4 ccw(c547.15,1247.4) 547.15,1254.75 508.71,1254.75 cw(c508.71,1262.1) 501.36,1262.1 501.36,1262.53 cw(c508.71,1262.53) 508.71,1269.88 537.66,1269.88 ccw(c537.66,1283.89) 551.67,1283.89 551.67,1348.83 U13.L7@536.04,1364.46 ; v1(520.29,703.04) U30.L7@536.04,718.79 ; U1.AC14@1156.52,1109.42 v1(1165.15,1100.68)
  L4 SIG w4.2: v1(493.12,1062.79) 401.51,1062.79 ; v1(1165.15,1100.68) 1150.21,1115.62 784.22,1115.62 ; 394.16,1051.87 ccw(c401.51,1051.87) 401.51,1044.52 ; 394.16,1051.87 ccw(c401.51,1051.87) 401.51,1044.52 ; 394.16,1051.87 394.16,1055.44 ; 394.16,1055.44 cw(c401.51,1055.44) 401.51,1062.79 ; 394.16,1055.44 cw(c401.51,1055.44) 401.51,1062.79 ; 401.51,1044.52 504.9,1044.52 ; 504.9,1044.52 ccw(c504.9,1073.87) 525.65,1053.12 ; 504.9,1044.52 ccw(c504.9,1073.87) 525.65,1053.12 ; 525.65,1053.12 528.34,1055.81 ; 528.34,1055.81 cw(c550.99,1033.16) 550.99,1065.19 ; 528.34,1055.81 cw(c550.99,1033.16) 550.99,1065.19 ; 550.99,1065.19 581.2,1065.19 ; 581.2,1065.19 cw(c581.2,1051.13) 591.13,1061.07 ; 581.2,1065.19 cw(c581.2,1051.13) 591.13,1061.07 ; 591.13,1061.07 592.32,1059.89 ; 592.32,1059.89 ccw(c604.24,1071.81) 604.24,1054.95 ; 592.32,1059.89 ccw(c604.24,1071.81) 604.24,1054.95 ; 604.24,1054.95 748.56,1054.95 ; 748.56,1054.95 ccw(c748.56,1073.7) 767.32,1073.7 ; 748.56,1054.95 ccw(c748.56,1073.7) 767.32,1073.7 ; 767.32,1073.7 767.32,1098.71 ; 767.32,1098.71 cw(c784.22,1098.71) 784.22,1115.62 ; 767.32,1098.71 cw(c784.22,1098.71) 784.22,1115.62
  Bottom w4.2: v1(493.12,1062.79) 493.12,996.85 ccw(c502.53,996.85) 502.53,987.44 506.08,987.44 ccw(c506.08,996.01) 514.66,996.01 514.66,1022.49 cw(c524.93,1022.49) 524.93,1032.77 527.13,1032.77 cw(c527.13,1023.08) 536.81,1023.08 536.81,860.52 cw(c520.11,860.52) 531.92,848.71 528.03,844.82 ccw(c546.71,826.14) 520.29,826.14 v1(520.29,703.04)
A11: U1.AE17 U13.R7 U30.R7 | length 2214.9
  Top w4.2: v1(277.2,1029.64) 284.65,1037.1 ccw(c240.22,1081.53) 303.06,1081.53 303.06,1106.75 cw(c357.96,1106.75) 319.14,1145.57 333.29,1159.72 ccw(c297.51,1195.5) 348.11,1195.5 348.11,1311.55 cw(c394.06,1311.55) 361.57,1344.04 cw(c372.7,1332.91) 372.7,1348.66 398.85,1348.66 ccw(c398.85,1359.87) 410.06,1359.87 U13.R7@410.06,1364.46 ; U30.R7@410.06,718.79 v1(425.81,703.04) ; v1(1010.24,1012.13) 1039.46,1041.34 1086.31,1041.34 1095,1032.65 U1.AE17@1105.34,1032.65
  L4 SIG w4.2: v1(277.2,1029.64) 317.71,989.13 ; v1(1010.24,1012.13) 987.34,989.22 ; 317.71,989.13 ccw(c358.35,1029.77) 358.35,972.3 ; 317.71,989.13 ccw(c358.35,1029.77) 358.35,972.3 ; 358.35,972.3 591.68,972.3 ; 569.58,946.45 ccw(c576.93,946.45) 576.93,939.1 ; 569.58,946.45 ccw(c576.93,946.45) 576.93,939.1 ; 569.58,946.45 569.58,947.86 ; 569.58,947.86 cw(c576.93,947.86) 576.93,955.21 ; 569.58,947.86 cw(c576.93,947.86) 576.93,955.21 ; 576.93,939.1 587.72,939.1 ; 576.93,955.21 591.68,955.21 ; 587.72,939.1 ccw(c587.72,963.92) 605.27,946.37 ; 587.72,939.1 ccw(c587.72,963.92) 605.27,946.37 ; 587.72,939.1 ccw(c587.72,963.92) 605.27,946.37 ; 587.72,939.1 ccw(c587.72,963.92) 605.27,946.37 ; 587.72,939.1 ccw(c587.72,963.92) 605.27,946.37 ; 587.72,939.1 ccw(c587.72,963.92) 605.27,946.37 ; 591.68,955.21 ccw(c591.68,962.56) 599.03,962.56 ; 591.68,955.21 ccw(c591.68,962.56) 599.03,962.56 ; 591.68,972.3 cw(c591.68,964.95) 599.03,964.95 ; 591.68,972.3 cw(c591.68,964.95) 599.03,964.95 ; 599.03,962.56 599.03,964.95 ; 605.27,946.37 621.49,962.58 ; 621.49,962.58 cw(c644.94,939.14) 644.94,972.3 ; 621.49,962.58 cw(c644.94,939.14) 644.94,972.3 ; 644.94,972.3 946.47,972.3 ; 946.47,972.3 ccw(c946.47,1030.08) 987.34,989.22 ; 946.47,972.3 ccw(c946.47,1030.08) 987.34,989.22 ; 946.47,972.3 ccw(c946.47,1030.08) 987.34,989.22 ; 946.47,972.3 ccw(c946.47,1030.08) 987.34,989.22 ; 946.47,972.3 ccw(c946.47,1030.08) 987.34,989.22 ; 946.47,972.3 ccw(c946.47,1030.08) 987.34,989.22
  Bottom w4.2: v1(277.2,1029.64) 277.2,933.95 ccw(c382.54,933.95) 308.05,859.46 396.23,771.29 cw(c365.02,740.08) 409.15,740.08 409.15,735.19 ccw(c446.56,735.19) 420.11,708.74 ; 420.11,708.74 v1(425.81,703.04)
A12: U1.AD15 U13.N7 U30.N7 | length 2176
  Top w4.2: v1(260.25,1099.54) 260.25,1119.1 cw(c323.97,1119.1) 278.92,1164.15 297.83,1183.07 ccw(c281.33,1199.57) 304.67,1199.57 304.67,1326.58 cw(c377.17,1326.58) 325.91,1377.85 327.05,1378.99 cw(c370.2,1335.84) 370.2,1396.87 462.54,1396.87 cw(c462.54,1380.44) 478.96,1380.44 478.96,1370.37 cw(c473.05,1370.37) U13.N7@473.05,1364.46 ; v1(442.37,749.47) cw(c449.57,749.47) 449.57,756.67 458.96,756.67 cw(c458.96,742.59) 473.05,742.59 U30.N7@473.05,718.79 ; v1(1119.39,1072.24) U1.AD15@1130.93,1083.83
  L4 SIG w4.2: v1(1119.39,1072.24) 1099.19,1072.24 1082.45,1088.98 949.47,1088.98 ; 280.12,1107.77 ccw(c280.12,1079.68) v1(260.25,1099.54) cw(c280.12,1079.68) 280.12,1107.77 ; 280.12,1107.77 299.26,1107.77 ; 299.26,1107.77 cw(c299.26,1067.67) 327.62,1096.02 ; 299.26,1107.77 cw(c299.26,1067.67) 327.62,1096.02 ; 327.62,1096.02 385.92,1037.72 ; 385.92,1037.72 ccw(c415.37,1067.18) 415.37,1025.52 ; 385.92,1037.72 ccw(c415.37,1067.18) 415.37,1025.52 ; 415.37,1025.52 852.22,1025.52 ; 852.22,1025.52 ccw(c852.22,1062.79) 878.58,1036.44 ; 852.22,1025.52 ccw(c852.22,1062.79) 878.58,1036.44 ; 852.22,1025.52 ccw(c852.22,1062.79) 878.58,1036.44 ; 852.22,1025.52 ccw(c852.22,1062.79) 878.58,1036.44 ; 852.22,1025.52 ccw(c852.22,1062.79) 878.58,1036.44 ; 852.22,1025.52 ccw(c852.22,1062.79) 878.58,1036.44 ; 878.58,1036.44 918.15,1076 ; 918.15,1076 cw(c949.47,1044.68) 949.47,1088.98 ; 918.15,1076 cw(c949.47,1044.68) 949.47,1088.98
  Bottom w4.2: v1(260.25,1099.54) 298.23,1061.56 cw(c269.57,1032.9) 310.11,1032.9 310.11,939.61 ccw(c397.38,939.61) 335.67,877.9 430.59,782.97 cw(c402.16,754.54) 442.37,754.54 v1(442.37,749.47)
A13: U1.AB10 U13.T3 U30.T3 | length 2401.3
  Top w4.2: v1(362.81,1506.19) U13.T3@378.56,1490.44 ; U30.T3@378.56,844.78 347.59,875.75 cw(c374.7,902.86) 336.35,902.86 336.35,922.4 cw(c368.59,922.4) 345.8,945.2 383.75,983.15 ccw(c329.07,1037.82) 406.39,1037.82 406.39,1055.06 cw(c413.74,1055.06) 413.74,1062.41 415.05,1062.41 cw(c415.05,1055.06) 422.4,1055.06 422.4,1041.52 ccw(c429.75,1041.52) 429.75,1034.17 431.47,1034.17 ccw(c431.47,1041.52) 438.82,1041.52 438.82,1075.59 cw(c479.84,1075.59) 450.83,1104.59 ccw(c410.47,1144.96) v1(467.55,1144.96) ; U1.AB10@1182.11,1211.78 v1(1192.41,1201.49)
  L4 SIG w4.2: v1(467.55,1144.96) 405.32,1207.19 ; v1(1192.41,1201.49) 1183.07,1201.49 ; 397.67,1225.68 ccw(c423.81,1225.68) 405.32,1207.19 ; 397.67,1225.68 ccw(c423.81,1225.68) 405.32,1207.19 ; 397.67,1225.68 397.67,1226.99 ; 397.67,1226.99 cw(c418.59,1226.99) 418.59,1247.92 ; 397.67,1226.99 cw(c418.59,1226.99) 418.59,1247.92 ; 418.59,1247.92 503.07,1247.92 ; 503.07,1247.92 cw(c503.07,1194.83) 540.61,1232.37 ; 503.07,1247.92 cw(c503.07,1194.83) 540.61,1232.37 ; 540.61,1232.37 548.53,1224.45 ; 548.53,1224.45 ccw(c569.17,1245.09) 569.17,1215.9 ; 548.53,1224.45 ccw(c569.17,1245.09) 569.17,1215.9 ; 548.53,1224.45 ccw(c569.17,1245.09) 569.17,1215.9 ; 548.53,1224.45 ccw(c569.17,1245.09) 569.17,1215.9 ; 548.53,1224.45 ccw(c569.17,1245.09) 569.17,1215.9 ; 548.53,1224.45 ccw(c569.17,1245.09) 569.17,1215.9 ; 569.17,1215.9 608.15,1215.9 ; 608.15,1215.9 ccw(c608.15,1257.1) 637.28,1227.97 ; 608.15,1215.9 ccw(c608.15,1257.1) 637.28,1227.97 ; 637.28,1227.97 653.97,1244.65 ; 653.97,1244.65 cw(c689.24,1209.39) 689.24,1259.26 ; 653.97,1244.65 cw(c689.24,1209.39) 689.24,1259.26 ; 689.24,1259.26 943.6,1259.26 ; 943.6,1259.26 cw(c943.6,1221.86) 970.05,1248.31 ; 943.6,1259.26 cw(c943.6,1221.86) 970.05,1248.31 ; 970.05,1248.31 983.2,1235.16 ; 983.2,1235.16 ccw(c998.74,1250.7) 998.74,1228.72 ; 983.2,1235.16 ccw(c998.74,1250.7) 998.74,1228.72 ; 983.2,1235.16 ccw(c998.74,1250.7) 998.74,1228.72 ; 983.2,1235.16 ccw(c998.74,1250.7) 998.74,1228.72 ; 983.2,1235.16 ccw(c998.74,1250.7) 998.74,1228.72 ; 983.2,1235.16 ccw(c998.74,1250.7) 998.74,1228.72 ; 998.74,1228.72 1070.72,1228.72 ; 1059.55,1253.81 ccw(c1066.9,1253.81) 1066.9,1246.46 ; 1059.55,1253.81 ccw(c1066.9,1253.81) 1066.9,1246.46 ; 1059.55,1253.81 1059.55,1256.99 ; 1059.55,1256.99 cw(c1066.9,1256.99) 1066.9,1264.34 ; 1059.55,1256.99 cw(c1066.9,1256.99) 1066.9,1264.34 ; 1066.9,1246.46 1070.72,1246.46 ; 1066.9,1264.34 1087.73,1264.34 ; 1070.72,1228.72 ccw(c1070.72,1236.07) 1078.07,1236.07 ; 1070.72,1228.72 ccw(c1070.72,1236.07) 1078.07,1236.07 ; 1070.72,1246.46 cw(c1070.72,1239.11) 1078.07,1239.11 ; 1070.72,1246.46 cw(c1070.72,1239.11) 1078.07,1239.11 ; 1078.07,1236.07 1078.07,1239.11 ; 1087.73,1264.34 cw(c1087.73,1222.83) 1117.09,1252.18 ; 1087.73,1264.34 cw(c1087.73,1222.83) 1117.09,1252.18 ; 1117.09,1252.18 1156.97,1212.3 ; 1156.97,1212.3 ccw(c1183.07,1238.4) 1183.07,1201.49 ; 1156.97,1212.3 ccw(c1183.07,1238.4) 1183.07,1201.49
  Bottom w4.2: v1(362.81,1506.19) 362.09,1505.47 362.09,1278.2 ccw(c429.15,1278.2) 381.74,1230.78 v1(467.55,1144.96)
A14: U1.AD17 U13.T7 U30.T7 | length 2376.4
  Top w4.2: v1(260.05,1016.27) 260.05,1026.42 cw(c295.23,1026.42) 270.35,1051.29 276.03,1056.97 ccw(c244.97,1088.03) 288.89,1088.03 288.89,1109.59 cw(c348.39,1109.59) 306.32,1151.66 318.88,1164.22 ccw(c284.56,1198.55) 333.1,1198.55 333.1,1319.09 cw(c384.26,1319.09) 348.08,1355.26 cw(c370.29,1333.06) 370.29,1364.46 U13.T7@378.56,1364.46 ; v1(318.56,718.79) U30.T7@378.56,718.79 ; v1(1034.03,1011.9) 1053.5,1031.38 1081.07,1031.38 1092.13,1020.32 1118.6,1020.32 U1.AD17@1130.93,1032.65
  L4 SIG w4.2: v1(260.05,1016.27) 292.78,983.55 ; v1(1034.03,1011.9) 1000.37,978.46 ; 292.78,983.55 ccw(c351.64,1042.4) 351.64,959.17 ; 292.78,983.55 ccw(c351.64,1042.4) 351.64,959.17 ; 351.64,959.17 545.57,959.17 ; 523.2,932.07 ccw(c530.55,932.07) 530.55,924.72 ; 523.2,932.07 ccw(c530.55,932.07) 530.55,924.72 ; 523.2,932.07 523.2,934.49 ; 523.2,934.49 cw(c530.55,934.49) 530.55,941.84 ; 523.2,934.49 cw(c530.55,934.49) 530.55,941.84 ; 530.55,924.72 588.49,924.72 ; 530.55,941.84 545.57,941.84 ; 545.57,941.84 ccw(c545.57,949.19) 552.92,949.19 ; 545.57,941.84 ccw(c545.57,949.19) 552.92,949.19 ; 545.57,959.17 cw(c545.57,951.82) 552.92,951.82 ; 545.57,959.17 cw(c545.57,951.82) 552.92,951.82 ; 552.92,949.19 552.92,951.82 ; 588.49,924.72 ccw(c588.49,961.25) 614.32,935.42 ; 588.49,924.72 ccw(c588.49,961.25) 614.32,935.42 ; 588.49,924.72 ccw(c588.49,961.25) 614.32,935.42 ; 588.49,924.72 ccw(c588.49,961.25) 614.32,935.42 ; 588.49,924.72 ccw(c588.49,961.25) 614.32,935.42 ; 588.49,924.72 ccw(c588.49,961.25) 614.32,935.42 ; 614.32,935.42 628.93,950.03 ; 628.93,950.03 cw(c645.82,933.14) 645.82,957.03 ; 628.93,950.03 cw(c645.82,933.14) 645.82,957.03 ; 645.82,957.03 948.64,957.03 ; 948.64,957.03 ccw(c948.64,1030.19) 1000.37,978.46 ; 948.64,957.03 ccw(c948.64,1030.19) 1000.37,978.46 ; 948.64,957.03 ccw(c948.64,1030.19) 1000.37,978.46 ; 948.64,957.03 ccw(c948.64,1030.19) 1000.37,978.46 ; 948.64,957.03 ccw(c948.64,1030.19) 1000.37,978.46 ; 948.64,957.03 ccw(c948.64,1030.19) 1000.37,978.46
  Bottom w4.2: v1(260.05,1016.27) 249.51,1005.73 ccw(c297.11,958.13) 229.79,958.13 229.79,895.53 ccw(c308.47,895.53) 252.83,839.89 272.4,820.33 cw(c245.66,793.58) 283.48,793.58 283.48,772.55 ccw(c328.56,772.55) 296.68,740.66 306.54,730.8 ; 306.55,730.8 v1(318.56,718.79)
A15: U1.AD11 U13.M7 U30.M7 | length 2303.7
  Top w4.2: v1(378,1094.78) 377.86,1093.98 cw(c400.99,1093.98) 377.87,1094.78 cw(c400.99,1093.98) 384.63,1110.33 493.95,1219.65 ccw(c488.75,1224.85) 496.1,1224.85 ccw(c488.75,1224.85) 493.95,1230.04 493.41,1230.58 ccw(c488.22,1225.38) 488.22,1232.73 ccw(c488.22,1225.38) 483.02,1230.58 459.79,1207.35 cw(c454.59,1212.54) 454.59,1205.19 cw(c454.59,1212.54) 449.39,1207.35 448.39,1208.35 cw(c453.59,1213.55) 446.24,1213.55 cw(c453.59,1213.55) 448.38,1218.74 ; 448.39,1218.74 476.32,1246.68 ccw(c445.66,1277.34) 489.03,1277.34 489.03,1340.2 cw(c510.13,1340.2) 495.21,1355.12 U13.M7@504.55,1364.46 ; U30.M7@504.55,718.79 v1(504.55,740.3) ; U1.AD11@1130.93,1186.19 v1(1141.16,1176.48)
  L4 SIG w4.2: v1(378,1094.78) 378,1106.23 ; v1(1141.16,1176.48) 1124.01,1159.33 724.88,1159.33 ; 323.09,1152.24 ccw(c330.44,1152.24) 330.44,1144.89 ; 323.09,1152.24 ccw(c330.44,1152.24) 330.44,1144.89 ; 323.09,1152.24 323.09,1152.72 ; 323.09,1152.72 cw(c330.44,1152.72) 330.44,1160.07 ; 323.09,1152.72 cw(c330.44,1152.72) 330.44,1160.07 ; 330.44,1144.89 370.31,1144.89 ; 330.44,1160.07 364.04,1160.07 ; 345.97,1121.05 ccw(c353.32,1121.05) 353.32,1113.7 ; 345.97,1121.05 ccw(c353.32,1121.05) 353.32,1113.7 ; 345.97,1121.05 345.97,1121.95 ; 345.97,1121.95 cw(c353.32,1121.95) 353.32,1129.3 ; 345.97,1121.95 cw(c353.32,1121.95) 353.32,1129.3 ; 353.32,1113.7 370.53,1113.7 ; 353.32,1129.3 370.31,1129.3 ; 364.04,1160.07 cw(c364.04,1119.86) 392.47,1148.29 ; 364.04,1160.07 cw(c364.04,1119.86) 392.47,1148.29 ; 370.31,1129.3 ccw(c370.31,1136.65) 377.66,1136.65 ; 370.31,1129.3 ccw(c370.31,1136.65) 377.66,1136.65 ; 370.31,1144.89 cw(c370.31,1137.54) 377.66,1137.54 ; 370.31,1144.89 cw(c370.31,1137.54) 377.66,1137.54 ; 370.53,1113.7 cw(c370.53,1106.23) 378,1106.23 ; 370.53,1113.7 cw(c370.53,1106.23) 378,1106.23 ; 377.66,1136.65 377.66,1137.54 ; 392.47,1148.29 414.66,1126.1 ; 414.66,1126.1 ccw(c451.77,1163.21) 451.77,1110.73 ; 414.66,1126.1 ccw(c451.77,1163.21) 451.77,1110.73 ; 414.66,1126.1 ccw(c451.77,1163.21) 451.77,1110.73 ; 414.66,1126.1 ccw(c451.77,1163.21) 451.77,1110.73 ; 414.66,1126.1 ccw(c451.77,1163.21) 451.77,1110.73 ; 414.66,1126.1 ccw(c451.77,1163.21) 451.77,1110.73 ; 451.77,1110.73 615.9,1110.73 ; 615.9,1110.73 ccw(c615.9,1216.06) 690.38,1141.58 ; 615.9,1110.73 ccw(c615.9,1216.06) 690.38,1141.58 ; 690.38,1141.58 696.28,1147.48 ; 696.28,1147.48 cw(c724.88,1118.88) 724.88,1159.33 ; 696.28,1147.48 cw(c724.88,1118.88) 724.88,1159.33
  Bottom w4.2: v1(378,1094.78) 396.17,1076.62 cw(c324.41,1004.86) 425.89,1004.86 425.89,898.86 ccw(c469.51,898.86) 438.66,868.02 480.04,826.64 cw(c420.89,767.48) 504.55,767.48 ; v1(504.55,740.3) 504.55,767.48
ACC_DET: R174.1 R184.2 U1.AD1 | length 3117.4
  Top w5: v1(242.95,726.25) 177.01,792.19 177.01,1554.61 293.43,1671.02 900.02,1671.02 946.74,1624.3 990.32,1624.3 1130.93,1483.69 U1.AD1@1130.93,1442.1
  Bottom w5: v1(242.95,726.25) 242.95,714.57 394.69,562.83 946.14,562.83 1036.3,652.99 1202.15,652.99 R174.1@1223.63,674.46 R184.2@1223.63,713.44
ACC_EN: D12.2 Q6.2 Q7.2 R176.1 R177.1 R184.1 | length 780.8
  Top w5: v1(1349.78,602.78) v1(1349.78,703.02)
  Bottom w5: D12.2@1020.88,544.01 1055.57,544.01 1097.91,501.67 1183.65,501.67 1284.74,602.76 Q7.2@1315.74,602.76 1349.76,602.76 1454.77,602.76 R177.1@1473.97,583.57 R176.1@1473.97,543.37 ; R184.1@1257.63,713.44 1290.37,713.44 Q6.2@1315.74,738.81 1318.16,738.81 1349.78,707.19 v1(1349.78,703.02)
ACC_IN: J8.4 R100.1 | length 1021.4
  Top w5: v1(1561.91,461.37) 1589.64,433.65 2018.03,433.65 2059.16,392.52 J8.4@2059.16,120.08
  Bottom w5: R100.1@1507.97,662.23 1561.91,608.28 v1(1561.91,461.37)
ACC_PWREN: D10.1 Q7.3 | length 307
  Bottom w5: D10.1@1140.88,456.37 1179.4,456.37 1288.29,565.26 Q7.3@1402.74,565.26
ADC_BAT: C182.2 R159.2 R166.1 U1.C4 | length 1407.7
  Top w5: U1.C4@1668.34,1365.33 1681.43,1378.42 1781.77,1378.42 v1(1808.08,1404.74) ; v1(1908.53,613.05) 1915.9,605.68 2192.35,605.68 v1(2192.67,605.36)
  Bottom w5: v1(1808.08,1404.74) 1853.41,1404.74 1899.87,1358.27 1899.87,621.71 v1(1908.53,613.05) ; v1(2192.67,605.36) C182.2@2217.37,605.37 R166.1@2217.23,566 R159.2@2217.23,525.64
ADC_KEY: C122.2 R85.2 R167.2 U1.D5 | length 4648.1
  Top w5: v1(-4.97,474.96) 88.64,568.56 88.64,687.81 140.16,739.33 R167.2@140.16,1394.74 ; U1.D5@1642.74,1339.73 1655.38,1327.09 1778.47,1327.09 v1(1779.26,1327.88)
  L4 SIG w5: v1(-4.97,474.96) 4.11,465.88 4.11,75.62 79.08,0.66 239.24,0.66 438.63,200.05 576.65,200.05 694.25,317.65 981.82,317.65 1056.43,392.27 1569.88,392.27 1601.19,360.95 1855.81,360.95 v1(1884.54,389.68)
  Bottom w5: v1(1779.26,1327.88) 1794.63,1312.24 R85.2@1801.01,1312.24 C122.2@1838.48,1312.24 1861.88,1312.24 1888.58,1285.54 1888.58,393.72 v1(1884.54,389.68)
AHD_CAM: J5.3 R89.1 R94.1 | length 179.8
  Top w5: J5.3@716.54,240.16 716.54,294.73 734.55,312.75 735.09,312.75 R94.1@795.68,312.78 R89.1@757.1,312.78
AHD_RESET: R32.2 U1.AA4 | length 603.3
  Top w5: v1(1138.24,1871.64) 1094.6,1828.01 1094.6,1580.26 1195.07,1479.8 1195.07,1377.95 U1.AA4@1207.71,1365.33
  Bottom w5: v1(1138.24,1871.64) R32.2@1160.91,1894.31
AMP_MICINN: C128.1 C131.1 R124.2 U35.1 | length 272.8
  Bottom w7: U35.1@197.26,601.99 U35.1@212.67,601.99 ; C128.1@212.67,650.26 U35.1@212.67,601.99 ; R124.2@334.39,472.99 C131.1@334.39,510.8 334.39,531.07 263.46,601.99 U35.1@212.67,601.99
AMP_MICINP: C127.1 R126.2 U35.7 | length 479.5
  Top w7: v1(136.43,679.73) 115.28,658.58 115.28,535.07 C127.1@139.46,510.89
  Bottom w7: U35.7@-46.84,551.99 6.43,551.99 27.04,572.6 R126.2@27.04,650.26 27.04,667.69 39.08,679.73 v1(136.43,679.73)
AUDREF: C39.1 U1.P22 | length 215.1
  Top w5: C39.1@1379.89,697.09 1374.35,702.64 1374.35,879.1 1374.35,892.2 U1.P22@1386.84,904.69
AVDD25_MIPI: C149.2 L7.2 U17.5 | length 106.4
  Bottom w25: L7.2@1183.43,1604.39 1183.43,1627.69 C149.2@1183.43,1648.01 1183.43,1676 1198.98,1691.54 U17.5@1211.83,1691.54
AVDD_MIPIM: C30.2 C31.2 C151.2 L7.1 U1.D9 U1.E9 U1.U3 U1.U4 U1.U5 | length 816.2
  Top w10: U1.U5@1310.07,1339.73 v1(1322.86,1352.53) ; U1.U4@1310.07,1365.33 v1(1322.86,1378.12) U1.U3@1310.07,1390.92 ; U1.E9@1617.15,1237.37 v1(1629.94,1250.17) U1.D9@1642.74,1237.37
  L4 SIG w15: v1(1322.86,1378.12) 1322.86,1347.36 1342.54,1327.67 1543.89,1327.67 1621.39,1250.17 v1(1629.94,1250.17)
  Bottom w10: v1@1322.46,1352.93 v1(1322.86,1352.53) ; v1@1322.46,1378.52 v1(1322.86,1378.12) v1@1322.46,1380.51
  Bottom w15: v1(1629.94,1250.17) 1650.09,1250.17 C31.2@1650.15,1250.11
  Bottom w20: v1@1322.46,1352.93 1322.46,1378.52 1322.46,1380.51 1322.46,1419.62 C30.2@1329.16,1426.33
  Bottom w25: L7.1@1223.43,1604.39 C151.2@1267.42,1604.47 1329.16,1542.72 C30.2@1329.16,1426.33